# Altium PCB project_1_2.PcbDoc
Units mil, origin at the board's own origin, x right, y up, seen from the top; angles counter-clockwise.
Board outline 3525 x 2100 mil, 2 copper layers (Top Layer, Bottom Layer); 11 components, 41 nets, 98 pads, 0 vias.
Unrouted connection lines stored in the file: 3.
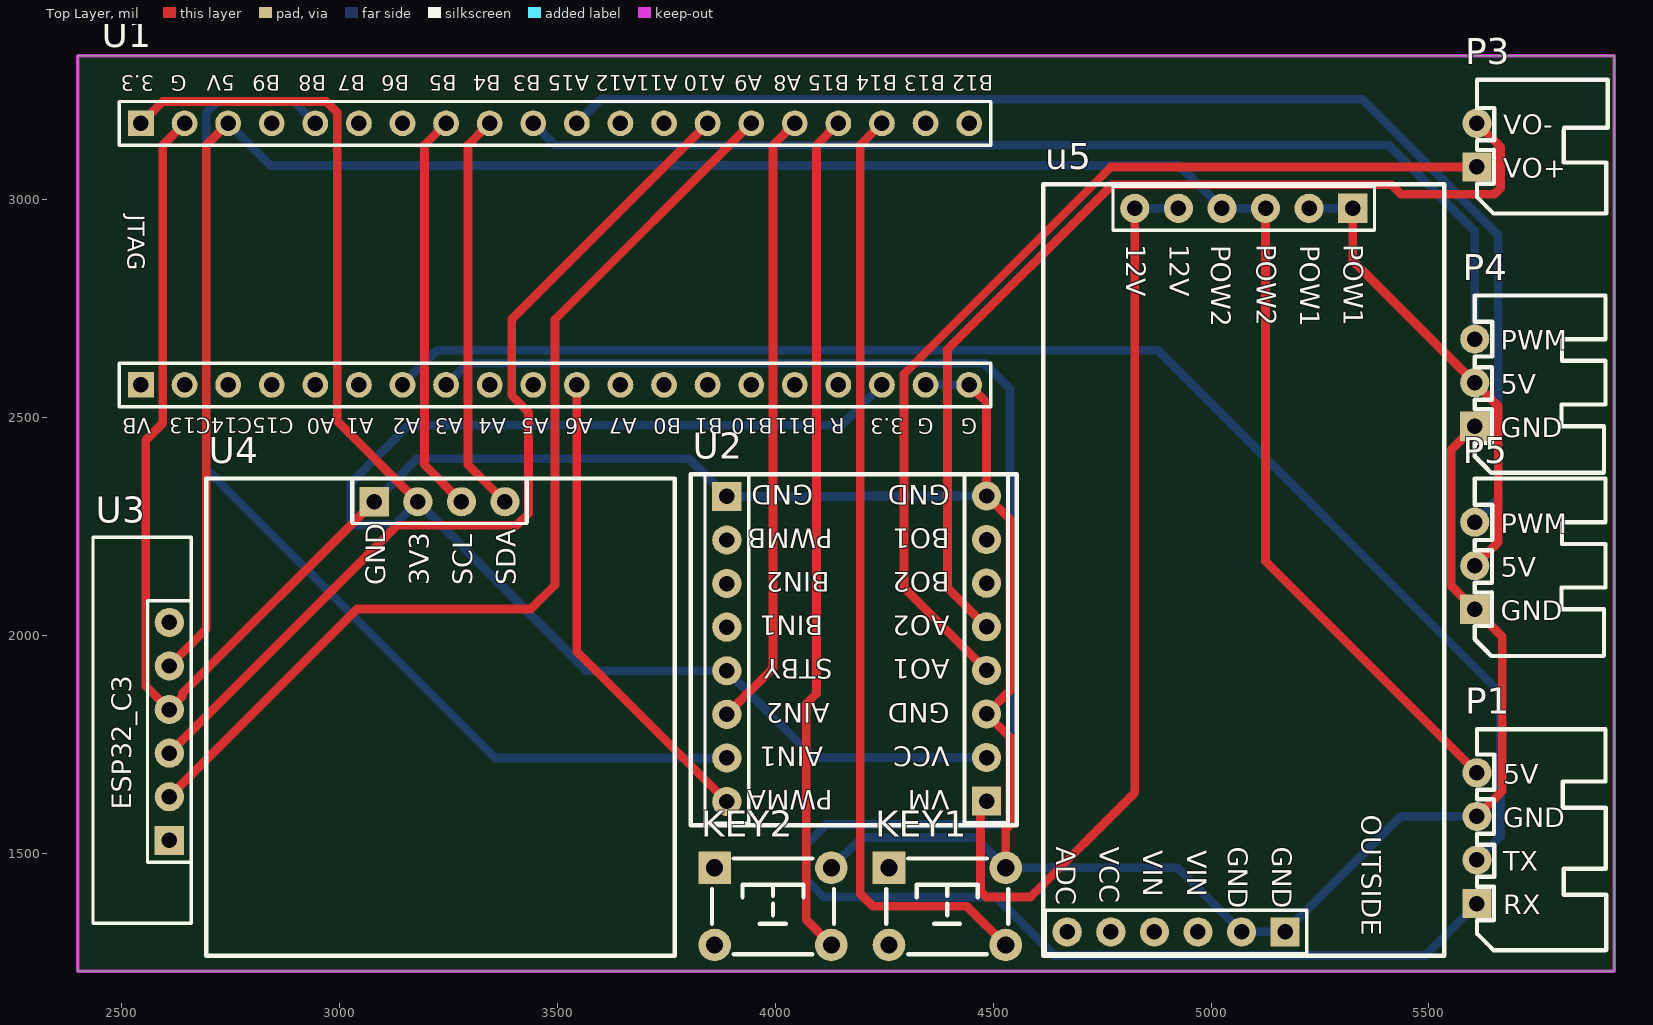
[diagram p0: Top Layer view]
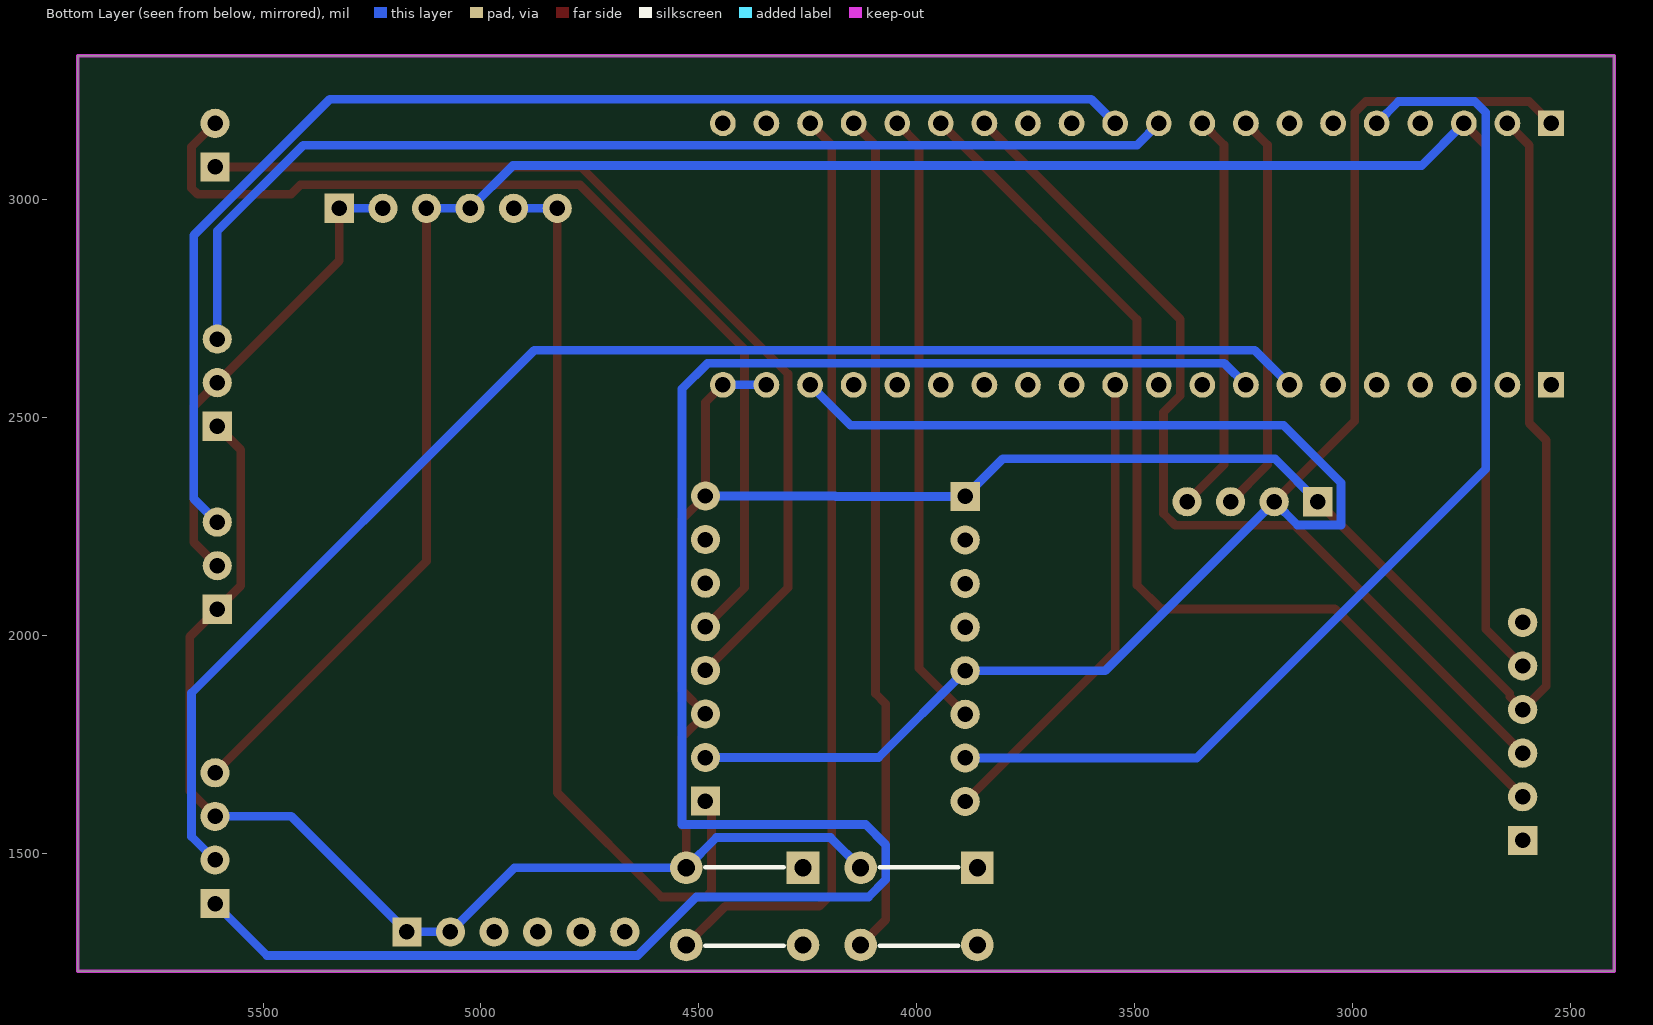
[diagram p1: Bottom Layer view, seen from below]

## Layer stack, top to bottom
Top Solder: solder mask 0.4, Solder Resist, Dk 3.5
Top Layer: signal copper 1.4
Dielectric 1: dielectric 12.6, FR-4, Dk 4.8
Bottom Layer: signal copper 1.4
Bottom Solder: solder mask 0.4, Solder Resist, Dk 3.5

## Board outline
2400,1230 2400,3330 5925,3330 5925,1230

## Design rules (kind name [scope] priority, off if disabled: settings)
Clearance [All] p1: gap=10 ignorepadtopadclearanceinfootprint=FALSE
ComponentClearance [All] p1: gap=10 collisioncheckmode=3 verticalgap=100000 showdistances=FALSE
PolygonConnect [All] p1: connectstyle=Relief reliefconductorwidth=10 reliefentries=4 polygonreliefangle="90 Angle" airgapwidth=10
RoutingVias [All] p1: holewidth=28 width=50 viastyle="Through Hole" minholewidth=28 minwidth=50 maxholewidth=28 maxwidth=50
SolderMaskExpansion [All] p1: expansion=4 istentingtop=FALSE
SupplyNets "Schematic Supply Nets_4" [InNet('5V_POW')] p1: voltage=0.000
SupplyNets "Schematic Supply Nets_3" [InNet('12V')] p2: voltage=0.000
SupplyNets "Schematic Supply Nets_2" [InNet('3V3')] p3: voltage=0.000
SupplyNets "Schematic Supply Nets_1" [InNet('5V')] p4: voltage=0.000
SupplyNets "Schematic Supply Nets" [InNet('GND')] p5: voltage=0.000
Width [All] p1: maxlimit=100 minlimit=10 preferedwidth=20 minimp=50.000000 maximp=50.000000 favimp=50.000000
29 further rules are at their usual default settings.

## Components (designator, comment, footprint, x,y, rotation, side; value= is the part's Value field where it differs from the comment)
KEY1 "mod_buttom" MOD_BUTTOM 4385,1378.5 r0 top
KEY2 "mod_buttom" MOD_BUTTOM 3985,1378.5 r0 top
P1 "port_uart_4p" XH2.54_4P 5765,1530 r270 top
P3 "port_mot_2p" XH2.54_2P 5735,3130 r270 top
P4 "port_pwm_3p" XH2.54_3P 5740,2565 r270 top
P5 "port_pwm_3p" XH2.54_3P 5740,2145 r270 top
U1 "f1_hw_2_gw" F1_HW_2_GW 3485,2865 r180 top
U2 "mod_tb6612" MOD_TB6612 4180,1970 r180 top
U3 "c3_hw_1" C3_HW_1 2610,1780 r90 top
U4 "mod_oled" mod_oled 3235,2305 r0 top
u5 "pow_hw_2" POW_HW_2 5095,2205 r270 top

## Footprints (in the part's own frame and the unit in brackets; to place one, negate y for a bottom-side part, rotate by r counter-clockwise, add the part's x,y. Pads: shape width x height; smd on the part's side, far side on the other; paste and mask are expansions set on the pad)
C3_HW_1 [mm]
  rect 1.7x1.7 hole 0.9: 1(-6.35,0)
  round 1.7 hole 0.9: 2(-3.81,0) 3(-1.27,0) 4(1.27,0) 5(3.81,0) 6(6.35,0)
  silkscreen extent -11.18,-1.27 11.3,4.45, body extent -11.18,-1.27 11.3,4.45, height 8.5
F1_HW_2_GW [mm]
  rect 1.5x1.5 hole 0.9: 1(23.876,7.366) 21(23.876,-7.874)
  round 1.5 hole 0.9: 2(21.336,7.366) 3(18.796,7.366) 4(16.256,7.366) 5(13.716,7.366) 6(11.176,7.366) 7(8.636,7.366) 8(6.096,7.366) 9(3.556,7.366) 10(1.016,7.366) 11(-1.524,7.366) 12(-4.064,7.366) 13(-6.604,7.366) 14(-9.144,7.366) 15(-11.684,7.366) 16(-14.224,7.366) 17(-16.764,7.366) 18(-19.304,7.366) 19(-21.844,7.366) 20(-24.384,7.366) 22(21.336,-7.874) 23(18.796,-7.874) 24(16.256,-7.874) 25(13.716,-7.874) 26(11.176,-7.874) 27(8.636,-7.874) 28(6.096,-7.874) 29(3.556,-7.874) 30(1.016,-7.874) 31(-1.524,-7.874) 32(-4.064,-7.874) 33(-6.604,-7.874) 34(-9.144,-7.874) 35(-11.684,-7.874) 36(-14.224,-7.874) 37(-16.764,-7.874) 38(-19.304,-7.874) 39(-21.844,-7.874) 40(-24.384,-7.874)
  silkscreen extent -25.65,-9.14 25.15,8.64, body extent -26.92,-11.56 26.42,11.18, height 0.25
MOD_BUTTOM [mm]
  rect 1.9x1.9 hole 1: 1(-3.146,2.25)
  round 1.9 hole 1: 2(-3.146,-2.25) 3(3.654,-2.25) 4(3.654,2.25)
  silkscreen extent -3.3,-2.79 3.81,2.79, body extent -3.85,-3 4.36,3, height 4.25
mod_oled [mm] "外购屏幕模块接口"
  rect 1.7x1.7 hole 0.9: 1(-3.935,0.047)
  round 1.7 hole 0.9: 2(-1.395,0.047) 3(1.145,0.047) 4(3.685,0.047)
  silkscreen extent -13.72,-26.4 13.58,1.4, body extent -13.72,-26.42 13.59,1.4, height 8.5
MOD_TB6612 [mm]
  rect 1.7x1.7 hole 0.9: 1(-7.747,8.89) 16(7.391,-8.867)
  round 1.7 hole 0.9: 2(-7.747,6.35) 3(-7.747,3.81) 4(-7.747,1.27) 5(-7.747,-1.27) 6(-7.747,-3.81) 7(-7.747,-6.35) 8(-7.747,-8.89) 9(7.391,8.913) 10(7.391,6.373) 11(7.391,3.833) 12(7.391,1.293) 13(7.391,-1.247) 14(7.391,-3.787) 15(7.391,-6.327)
  silkscreen extent -9.5,-10.16 9.5,10.29, body extent -9.5,-10.16 9.5,10.29, height 8.5
POW_HW_2 [mm] "pow_hw_2"
  round 1.7 hole 0.9: 0(22.479,-8.255) 1(22.479,-5.715) 1(22.479,-3.175) 2(22.479,-0.635) 3(-19.685,-6.858) 3(-19.685,-4.318) 4(-19.685,-1.778) 4(-19.685,0.762) 5(-19.685,3.302) 6(22.479,-10.795)
  rect 1.7x1.7 hole 0.9: 2(22.479,1.905) 5(-19.685,5.842)
  silkscreen extent -21.08,-12.19 23.88,11.18, body extent -21.08,-12.19 23.88,11.18, height 8.5
XH2.54_2P [mm]
  rect 1.7x1.7 hole 0.9: 1(1.397,-3.175)
  round 1.7 hole 0.9: 2(-1.143,-3.175)
  silkscreen extent -3.68,-3.18 4.11,4.44, body extent -3.64,-3.52 3.9,4.17, height 5.73
XH2.54_3P [mm]
  rect 1.7x1.7 hole 0.9: 1(2.159,-3.429)
  round 1.7 hole 0.9: 2(-0.381,-3.429) 3(-2.921,-3.429)
  silkscreen extent -5.46,-3.43 4.88,4.19, body extent -5.42,-3.78 4.66,3.92, height 5.73
XH2.54_4P [mm]
  rect 1.7x1.7 hole 0.9: 1(3.683,-3.937)
  round 1.7 hole 0.9: 2(1.143,-3.937) 3(-1.397,-3.937) 4(-3.937,-3.937)
  silkscreen extent -6.48,-3.94 6.4,3.59, body extent -6.44,-4.29 6.18,3.41, height 5.73

## Part data
KEY1 KEY2: "6*6*4.3按键"
P1: "串口接口/SPP蓝牙模块 / XH2.54弯排针4p/4p排母"
P3: "开环直流电机接口 / XH2.54弯排针2p"
P4 P5: "舵机接口 / XH2.54弯排针3p"
U2: "TB6612模块 / 8p排母*2"
U3: "ESP32C3蓝牙模块 / 6p排母"
U4: "外购屏幕模块"
u5: "两路升降压电源模块 / 6p排母*2"

## Nets (pads, with @x,y where several pads share a name; then routed paths per layer and width w, separated by ;. In a path a pad name is that pad's centre, name@x,y a point inside that pad or via, vN(x,y) a via of type N, cw(c..) or ccw(c..) an arc to the next point about the centre after c; other vN are vias at no path point)
3V3: U1.18 U1.21 U2.2 U2.12 U4.2 | length 4582.7
  Top Layer w20: U1.21 2595,3225 2970,3225 2995,3200 2995,2491.94 U4.2
  Bottom Layer w20: U1.18 4152,2482 3158.62,2482 3026.62,2350 3026.62,2253.38 3126.62,2253.38 U4.2 3567.85,1919.09 U2.12 4088.11,1720 U2.2
5V: P1.4 U1.23 U3.5 u5.4 | length 5257.6
  Top Layer w20: U3.5 2695,2015 2695,3125 U1.23 ; u5.4@5125,2980 5125,2170 P1.4
  Bottom Layer w20: U1.23 2842,3078 4927,3078 5025,2980 u5.4@5125,2980
5V_POW: P4.2 P5.2 u5.5 | length 1080.7
  Top Layer w20: u5.5@5325,2980 5325,2860 P4.2 5659,2526 5659,2214 P5.2
  Bottom Layer w20: u5.5@5225,2980 u5.5@5325,2980
12V: U2.1 u5.3 | length 2112.2
  Top Layer w20: U2.1 4471,1606 4471,1413 4484,1400 4586,1400 4825,1639 u5.3@4825,2980
  Bottom Layer w20: u5.3@4825,2980 u5.3@4925,2980
AO1: P3.1 U2.4 | length 2269.8
  Top Layer w20: U2.4 4295.47,2109.53 4295.47,2600 4770.47,3075 P3.1
AO2: P3.2 U2.5 | length 2284.7
  Top Layer w20: U2.5 4395.47,2109.53 4395.47,2656.47 4773,3034 5414,3034 5436,3012 5650,3012 5664,3026 5664,3121 P3.2
GND: KEY1.4 KEY2.4 P1.3 P4.1 P5.1 U1.19 U1.20 U1.22 U2.3 U2.8 U2.16 U3.4 U4.1 u5.2 | length 7552.5
  Top Layer w20: U1.22 2595,3125 2595,2487 2556,2448 2556,1884 U3.4 2640,1860 2640,1866.76 U4.1 ; U1.20 4485,2535 U2.8 4539,2266 4539,1874 U2.3 4539,1766 4539,1566 4528.86,1555.86 KEY1.4 ; P4.1 5551,2426 5551,2114 P5.1 5668,1997 5668,1643 P1.3
  Bottom Layer w20: U4.1 3178.42,2405.18 3802.93,2405.18 U2.16 4186,2319.09 4186.91,2320 U2.8 ; KEY2.4 4198.31,1536.53 4459.41,1536.53 KEY1.4 4922.91,1467.09 5070,1320 5170,1320 5435,1585 P1.3 ; U1.19 U1.20
NRST: U1.17
PA0: U1.5
PA1: U1.6
PA2: P1.2 U1.7 | length 3283.1
  Bottom Layer w20: U1.7 3224.53,2654.53 4877.47,2654.53 5664,1868 5664,1539 P1.2
PA3: P1.1 U1.8 | length 4565.6
  Bottom Layer w20: U1.8 3294.53,2624.53 4480,2624.53 4539,2565.53 4539,1566.53 4117.53,1566.53 4071,1520 4071,1440 4111,1400 4506,1400 4640,1266 5491,1266 P1.1
PA4: U1.9
PA5: U1.10
PA6: U1.11 U2.9 | length 1098.4
  Top Layer w20: U1.11 3545,1963.11 U2.9
PA7: U1.12
PA8: U1.36 U2.11 | length 1420.5
  Top Layer w20: U2.11 3995,1925.08 3995,3125 U1.36
PA9: U1.35 U3.2 | length 2331.7
  Top Layer w20: U3.2 3041,2061 3440,2061 3495,2116 3495,2725 U1.35
PA10: U1.34 U3.3 | length 2149
  Top Layer w20: U3.3 3133,2253 3407,2253 3434,2280 3434,2512 3395.47,2550.53 3395.47,2725.47 U1.34
PA11: U1.33
PA12: U1.32
PA15: P5.3 U1.31 | length 2946.4
  Bottom Layer w20: U1.31 3600,3230 5347,3230 5659,2918 5659,2314 P5.3
PB0: U1.13
PB1: U1.14
PB3: P4.3 U1.30 | length 2510.3
  Bottom Layer w20: U1.30 3495,3125 5408,3125 5605,2928 P4.3
PB4: U1.29 U4.4 | length 923.7
  Top Layer w20: U1.29 3295.47,3125.47 3295.47,2391.47 U4.4
PB5: U1.28 U4.3 | length 923.7
  Top Layer w20: U1.28 3195.47,3125.47 3195.47,2391.47 U4.3
PB6: U1.27
PB7: U1.26
PB8: U1.25 U2.10 | length 2567.7
  Bottom Layer w20: U1.25 2895,3225 2720,3225 2695,3200 2695,2382 3357.91,1719.09 U2.10
PB9: U1.24
PB10: U1.15
PB11: U1.16
PB12: U1.40
PB13: U1.39
PB14: KEY1.3 U1.38 | length 2170.1
  Top Layer w20: U1.38 4195.47,3125.47 4195.47,1407.53 4224,1379 4439.78,1379 KEY1.3
PB15: KEY2.3 U1.37 | length 1939.7
  Top Layer w20: KEY2.3 4071,1347.78 4071,1843 4095,1867 4095,3125 U1.37
PC13: U1.2
PC14: U1.3
PC15: U1.4
VBAT: U1.1
pads on no net: KEY1.1 KEY1.2 KEY2.1 KEY2.2 U2.6 U2.7 U2.13 U2.14 U2.15 U3.1 U3.6 u5.0 u5.1 u5.6

## Keep-outs
Keep-Out Layer:
  lines w7.87: 2400,1230 5925,1230 5925,3295 5925,3330 2400,3330 2400,3320 2400,1230

## Silkscreen, mask and mechanical layers (free items; w line width, h text height)
Top Overlay:

## Text inside footprints (layer, text, board x,y; h text height)
P1: Top Overlay "RX" at 5670,1360 h45; Top Overlay "TX" at 5670,1460 h45; Top Overlay "GND" at 5670,1560 h45; Top Overlay "5V" at 5670,1660 h45
P3: Top Overlay "VO+" at 5670,3050 h45; Top Overlay "VO-" at 5670,3150 h45
P4: Top Overlay "PWM" at 5665,2655 h45; Top Overlay "5V" at 5665,2555 h45; Top Overlay "GND" at 5665,2455 h45
P5: Top Overlay "PWM" at 5665,2235 h45; Top Overlay "5V" at 5665,2135 h45; Top Overlay "GND" at 5665,2035 h45
U1: Top Overlay "JTAG" at 2515,2965 h39.37 r270; Top Overlay "R" at 4160,2498 h35.43 r180; Top Overlay "B11" at 4094,2498 h35.43 r180; Top Overlay "B10" at 3995,2498 h35.43 r180; Top Overlay "B1" at 3880,2498 h35.43 r180; Top Overlay "B0" at 3785,2498 h35.43 r180; Top Overlay "A0" at 2990,2498 h35.43 r180; Top Overlay "A1" at 3079,2498 h35.43 r180; Top Overlay "A2" at 3185.71,2498 h35.43 r180; Top Overlay "A3" at 3283.57,2498 h35.43 r180; Top Overlay "A4" at 3383,2498 h35.43 r180; Top Overlay "A5" at 3481,2498 h35.43 r180; Top Overlay "A6" at 3582,2498 h35.43 r180; Top Overlay "A7" at 3682,2498 h35.43 r180; Top Overlay "VB" at 2569,2498 h35.43 r180; Top Overlay "3.3" at 4295,2498 h35.43 r180; Top Overlay "G" at 4364,2498 h35.43 r180; Top Overlay "G" at 4464,2498 h35.43 r180; Top Overlay "B12" at 4500,3285 h35.43 r180; Top Overlay "B13" at 4390,3285 h35.43 r180; Top Overlay "B14" at 4280,3285 h35.43 r180; Top Overlay "B15" at 4170,3285 h35.43 r180; Top Overlay "A8" at 4060,3285 h35.43 r180; Top Overlay "A9" at 3970,3285 h35.43 r180; Top Overlay "A10" at 3885,3285 h35.43 r180; Top Overlay "A11" at 3777,3285 h35.43 r180; Top Overlay "A12" at 3682,3285 h35.43 r180; Top Overlay "A15" at 3574,3285 h35.43 r180; Top Overlay "B3" at 3462,3285 h35.43 r180; Top Overlay "B4" at 3370,3285 h35.43 r180; Top Overlay "B5" at 3270,3285 h35.43 r180; Top Overlay "B6" at 3160,3285 h35.43 r180; Top Overlay "B7" at 3060,3285 h35.43 r180; Top Overlay "B8" at 2970,3285 h35.43 r180; Top Overlay "B9" at 2865,3285 h35.43 r180; Top Overlay "5V" at 2760,3285 h35.43 r180; Top Overlay "G" at 2650,3285 h35.43 r180; Top Overlay "3.3" at 2575,3285 h35.43 r180; Top Overlay "C15C14C13" at 2895,2500 h35.43 r180
U2: Top Overlay "GND" at 4087.51,2345 h45 r180; Top Overlay "PWMB" at 4132.5,2245 h45 r180; Top Overlay "BIN2" at 4125,2145 h45 r180; Top Overlay "BIN1" at 4110,2045 h45 r180; Top Overlay "STBY" at 4132.5,1945 h45 r180; Top Overlay "AIN2" at 4125,1845 h45 r180; Top Overlay "AIN1" at 4110,1745 h45 r180; Top Overlay "PWMA" at 4132.5,1645 h45 r180; Top Overlay "GND" at 4400,1845 h45 r180; Top Overlay "GND" at 4400,2345 h45 r180; Top Overlay "BO2" at 4400,2145 h45 r180; Top Overlay "BO1" at 4400,2245 h45 r180; Top Overlay "AO2" at 4400,2045 h45 r180; Top Overlay "AO1" at 4400,1945 h45 r180; Top Overlay "VCC" at 4400,1745 h45 r180; Top Overlay "VM" at 4400,1645 h45 r180
U3: Top Overlay "ESP32_C3" at 2522.5,1600 h45 r90
U4: Top Overlay "3V3" at 3205,2115 h45 r90; Top Overlay "SCL" at 3305,2115 h45 r90; Top Overlay "SDA" at 3405,2115 h45 r90; Top Overlay "GND" at 3105,2115 h45 r90
u5: Top Overlay "POW2" at 5000,2895 h45 r270; Top Overlay "POW1" at 5205,2895 h45 r270; Top Overlay "12V" at 4805,2897.38 h45 r270; Top Overlay "12V" at 4905,2897.38 h45 r270; Top Overlay "POW2" at 5105,2897.38 h45 r270; Top Overlay "POW1" at 5305,2897.38 h45 r270; Top Overlay "GND" at 5040,1515 h45 r270; Top Overlay "GND" at 5140,1515 h45 r270; Top Overlay "VIN" at 4845,1507.5 h45 r270; Top Overlay "VIN" at 4945,1507.5 h45 r270; Top Overlay "ADC" at 4645,1515 h45 r270; Top Overlay "VCC" at 4745,1515 h45 r270; Top Overlay "OUTSIDE" at 5346.23,1589.16 h45 r270